# Altium PCB Ant_Robot.PcbDoc
Units mil, origin at the board's own origin, x right, y up, seen from the top; angles counter-clockwise.
Board outline 2790.03 x 1590.03 mil, 2 copper layers (Top Layer, Bottom Layer); 43 components, 38 nets, 224 pads, 25 vias.
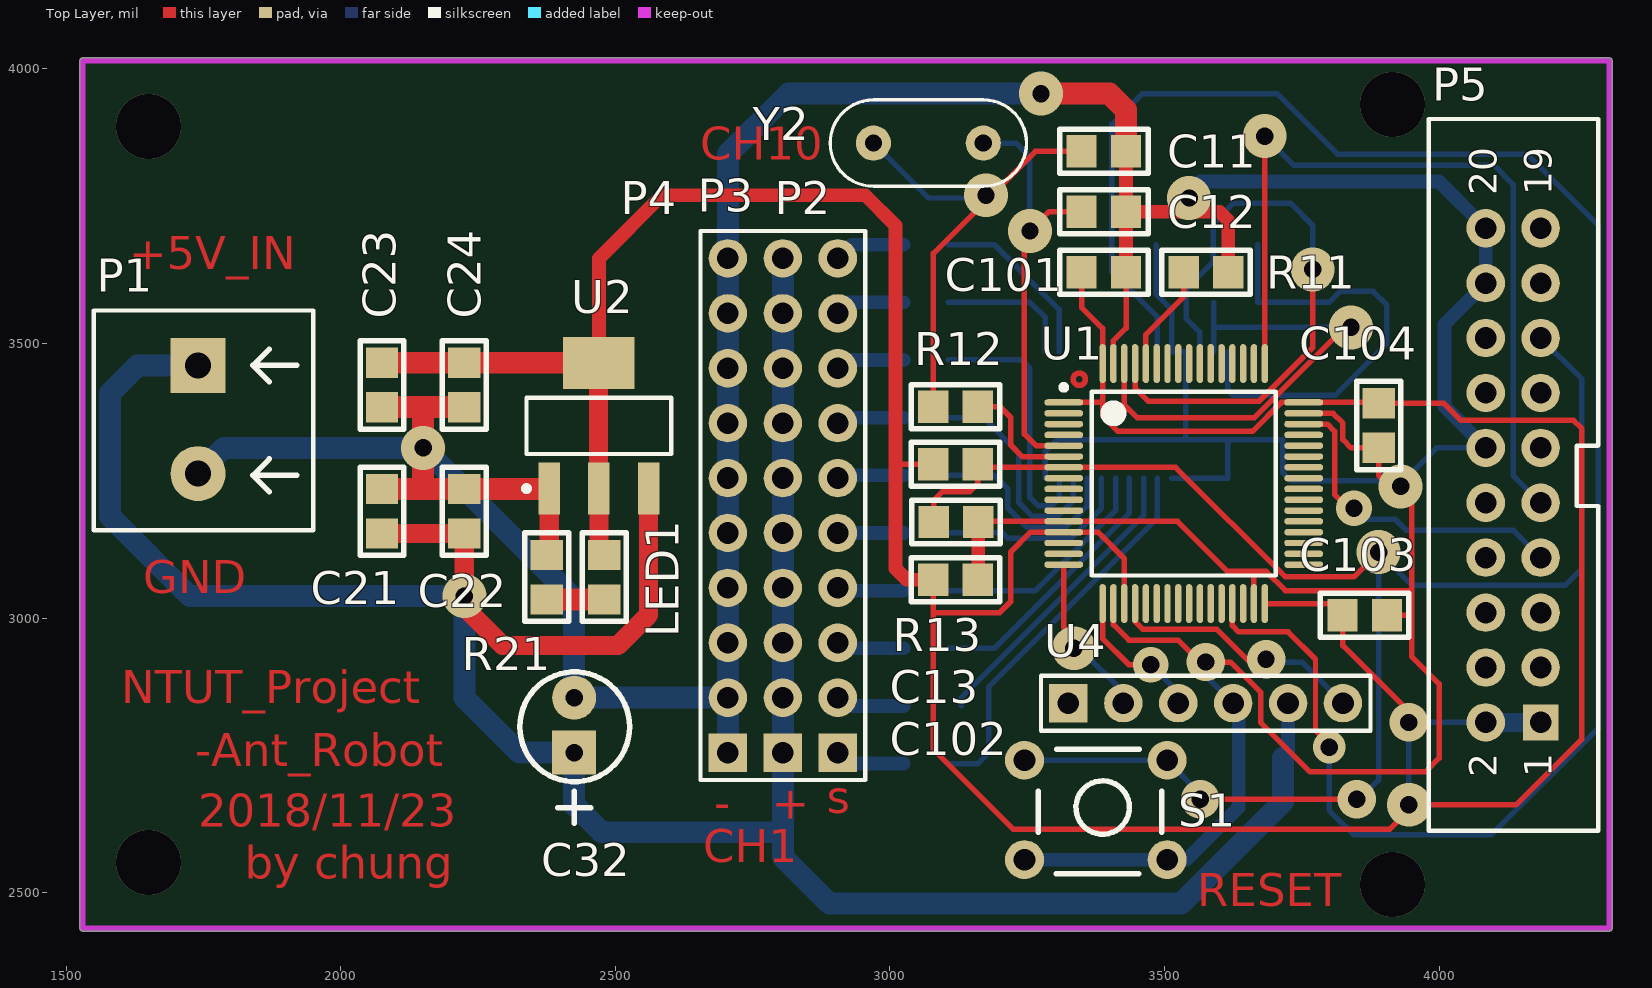
[diagram p0: Top Layer view]
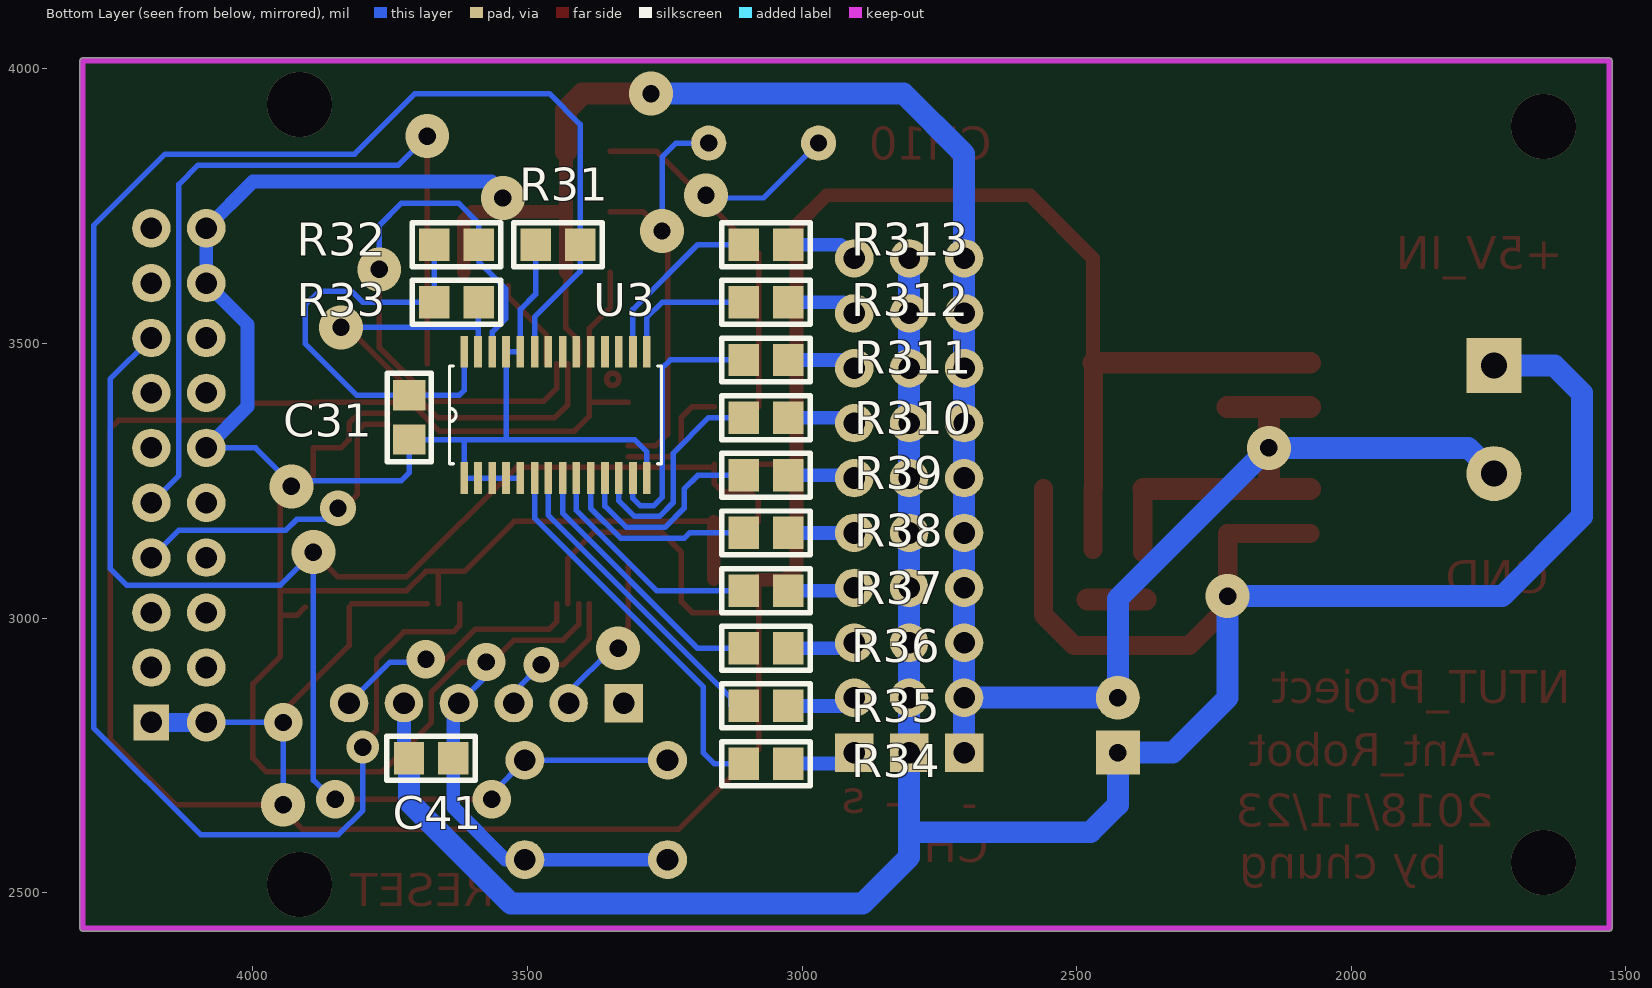
[diagram p1: Bottom Layer view, seen from below]

## Layer stack, top to bottom
Top Solder: solder mask 0.4, Solder Resist, Dk 3.5
Top Layer: signal copper 1.4
Dielectric 1: dielectric 12.6, FR-4, Dk 4.8
Bottom Layer: signal copper 1.4
Bottom Solder: solder mask 0.4, Solder Resist, Dk 3.5

## Board outline
1530,2429.99 cw(c1530,2435) 1524.98,2435 1524.98,4015 cw(c1530,4015) 1530,4020.01 4310,4020.01 cw(c4310,4015) 4315.02,4015 4315.02,2435 cw(c4310,2435) 4310,2429.99

## Design rules (kind name [scope] priority, off if disabled: settings)
Clearance [All] p1: gap=5 ignorepadtopadclearanceinfootprint=FALSE except(0: Arc-Hole Track-Hole SMDPad-Hole THPad-Hole Via-Hole Fill-Hole Poly-Hole Region-Hole Text-Hole)
ComponentClearance ComponentClearance_PWM_PORT [InComponentClass('PWM_PORT')] p1: gap=0 collisioncheckmode=3 verticalgap=0 showdistances=FALSE
ComponentClearance [All] p2: gap=5 collisioncheckmode=3 verticalgap=10 showdistances=FALSE
PolygonConnect [All] p1: connectstyle=Relief reliefconductorwidth=10 reliefentries=4 polygonreliefangle="90 Angle" airgapwidth=10
RoutingVias [All] p1: holewidth=31.5 width=70 viastyle="Through Hole" minholewidth=27.56 minwidth=50 maxholewidth=118.11 maxwidth=118.11
SilkToSilkClearance [All] p1: silktosilkclearance=5
SilkToSolderMaskClearance [IsPad] p1: minsilkscreentomaskgap=5 clearancetoexposedcopper=TRUE
SolderMaskExpansion [All] p1: expansion=4 istentingtop=FALSE
Width [All] p1: maxlimit=40 minlimit=10 preferedwidth=20
27 further rules are at their usual default settings.

## Classes and differential pairs
component class PWM_PORT: P2 P3 P4

## Components (designator, comment, footprint, x,y, rotation, side; value= is the part's Value field where it differs from the comment)
C11 "20pF" "SMD 0805" 3430,3850 r180 top
C12 "20pF" "SMD 0805" 3430,3740 r180 top
C13 "0.1uF" "SMD 0805" 3080,3175 r0 top
C21 "10uF" "SMD 0805" 2075,3235 r270 top
C22 "0.1uF" "SMD 0805" 2225,3235 r270 top
C23 "0.1uF" "SMD 0805" 2075,3465 r270 top
C24 "10uF" "SMD 0805" 2225,3465 r270 top
C31 "0.1uF" "SMD 0805" 3715,3325 r90 bottom
C32 "100uF" C2 2425,2855 r270 top
C41 "0.1uF" "SMD 0805" 3635,2745 r0 bottom
C101 "0.1uF" "SMD 0805" 3430,3630 r180 top
C102 "0.1uF" "SMD 0805" 3160,3070 r180 top
C103 "0.1uF" "SMD 0805" 3905,3005 r180 top
C104 "0.1uF" "SMD 0805" 3890,3310 r90 top
LED1 "LED" "SMD 0805" 2480,3115 r270 top
P1 "power" "HDR1X2 - 5mm" 1740,3460 r270 top
P2 "PWM" HDR1X10 2905,2755 r90 top
P3 "VCC" HDR1X10 2805,2755 r90 top
P4 "GND" HDR1X10 2705,2755 r90 top
P5 "JTAG_Connector" JTAG_PIN_20 4185,2810 r90 top
R11 "R1" "SMD 0805" 3535,3630 r0 top
R12 "R1" "SMD 0805" 3160,3385 r180 top
R13 "R1" "SMD 0805" 3160,3280 r180 top
R21 "R1" "SMD 0805" 2375,3115 r270 top
R31 "R1" "SMD 0805" 3485,3680 r180 bottom
R32 "R1" "SMD 0805" 3670,3680 r180 bottom
R33 "R1" "SMD 0805" 3670,3575 r180 bottom
R34 "R1" "SMD 0805" 3025,2735 r0 bottom
R35 "R1" "SMD 0805" 3025,2840 r0 bottom
R36 "R1" "SMD 0805" 3025,2945 r0 bottom
R37 "R1" "SMD 0805" 3025,3050 r0 bottom
R38 "R1" "SMD 0805" 3025,3155 r0 bottom
R39 "R1" "SMD 0805" 3025,3260 r0 bottom
R310 "R1" "SMD 0805" 3025,3365 r0 bottom
R311 "R1" "SMD 0805" 3025,3470 r0 bottom
R312 "R1" "SMD 0805" 3025,3575 r0 bottom
R313 "R1" "SMD 0805" 3025,3680 r0 bottom
S1 "SW" SW 3245,2560 r0 top
U1 "STM32L052R8" LQFP64_N 3535,3245 r0 top
U2 "AM1117" SOT-223 2470,3350 r90 top
U3 "PCA9685PW" TSSOP28 3615,3255 r180 bottom
U4 "HC_05" HDR1X6 3325,2845 r0 top
Y2 "8MHz" XTAL4-8 3070,3865 r180 top

## Footprints (in the part's own frame and the unit in brackets; to place one, negate y for a bottom-side part, rotate by r counter-clockwise, add the part's x,y. Pads: shape width x height; smd on the part's side, far side on the other; paste and mask are expansions set on the pad)
C2 [mil]
  rect 80x80 hole 31.5: 1(100,0)
  round 80 hole 31.5: 2(0,0)
  silkscreen extent -47,-99 229,101
"HDR1X2 - 5mm" [mm] "Connector; Header; 2 Position"
  rect 2.54x2.54 hole 1.2: 1(0,0)
  round 2.54 hole 1.2: 2(5,0)
  silkscreen extent -2.54,-4.83 7.62,5.33
HDR1X6 [mil] "Connector; Header; 6 Position"
  rect 70x70 hole 39.37: 1(0,0)
  round 70 hole 39.37: 2(100,0) 3(200,0) 4(300,0) 5(400,0) 6(500,0)
  silkscreen extent -50,-50 550,50
HDR1X10 [mil] "Connector; Header; 10 Position"
  rect 70x70 hole 39.37: 1(0,0)
  round 70 hole 39.37: 2(100,0) 3(200,0) 4(300,0) 5(400,0) 6(500,0) 7(600,0) 8(700,0) 9(800,0) 10(900,0)
  silkscreen extent -50,-50 950,50
JTAG_PIN_20 [mil] "Connector; Header; 10x2 Position"
  rect 65x65 hole 39.37: 1(0,0)
  round 70 hole 39.37: 2(0,100) 3(100,0) 4(100,100) 5(200,0) 6(200,100) 7(300,0) 8(300,100) 9(400,0) 10(400,100) 11(500,0) 12(500,100) 13(600,0) 14(600,100) 15(700,0) 16(700,100) 17(800,0) 18(800,100) 19(900,0) 20(900,100)
  silkscreen extent -197,-105 1099,204
LQFP64_N [mm] "Thin QFP, 64-Leads, Body 10x10mm, Pitch 0.5mm, IPC Medium Density"
  oval 1.8x0.3 smd: 1(-5.55,3.75) 2(-5.55,3.25) 3(-5.55,2.75) 4(-5.55,2.25) 5(-5.55,1.75) 6(-5.55,1.25) 7(-5.55,0.75) 8(-5.55,0.25) 9(-5.55,-0.25) 10(-5.55,-0.75) 11(-5.55,-1.25) 12(-5.55,-1.75) 13(-5.55,-2.25) 14(-5.55,-2.75) 15(-5.55,-3.25) 16(-5.55,-3.75) 33(5.55,-3.75) 34(5.55,-3.25) 35(5.55,-2.75) 36(5.55,-2.25) 37(5.55,-1.75) 38(5.55,-1.25) 39(5.55,-0.75) 40(5.55,-0.25) 41(5.55,0.25) 42(5.55,0.75) 43(5.55,1.25) 44(5.55,1.75) 45(5.55,2.25) 46(5.55,2.75) 47(5.55,3.25) 48(5.55,3.75)
  oval 0.3x1.8 smd: 17(-3.75,-5.55) 18(-3.25,-5.55) 19(-2.75,-5.55) 20(-2.25,-5.55) 21(-1.75,-5.55) 22(-1.25,-5.55) 23(-0.75,-5.55) 24(-0.25,-5.55) 25(0.25,-5.55) 26(0.75,-5.55) 27(1.25,-5.55) 28(1.75,-5.55) 29(2.25,-5.55) 30(2.75,-5.55) 31(3.25,-5.55) 32(3.75,-5.55) 49(3.75,5.55) 50(3.25,5.55) 51(2.75,5.55) 52(2.25,5.55) 53(1.75,5.55) 54(1.25,5.55) 55(0.75,5.55) 56(0.25,5.55) 57(-0.25,5.55) 58(-0.75,5.55) 59(-1.25,5.55) 60(-1.75,5.55) 61(-2.25,5.55) 62(-2.75,5.55) 63(-3.25,5.55) 64(-3.75,5.55)
  silkscreen extent -5.67,-4.25 4.25,4.57, body extent -5,-5 5,5, height 1.6
"SMD 0805" [mm]
  rect 1.4x1.5 smd: 1(0,0) 2(2.057,0)
  silkscreen extent -1.02,-1.02 3.07,1.02
SOT-223 [mm] "SOT223, 4-Leads, Body 6.7x7.3mm (max), Pitch 2.30mm, IPC Medium Density"
  rect 2.4x1 smd: 1(-2.9,2.3) 2(-2.9,0) 3(-2.9,-2.3)
  rect 2.4x3.3 smd: 2(2.9,0)
  silkscreen extent -3.02,-3.35 1.3,3.47, body extent -1.86,-3.35 1.86,3.35, height 1.8
SW [mm]
  round 1.8 hole 1: 1(0,4.6) 1(6.6,4.6) 2(0,0) 2(6.6,0)
  silkscreen extent 0.64,-0.66 6.35,5.11
TSSOP28 [mil]
  rect 14x58 smd: 1(0,0) 2(25,0) 3(51,0) 4(76,0) 5(102,0) 6(128,0) 7(153,0) 8(179,0) 9(204,0) 10(230,0) 11(256,0) 12(281,0) 13(307,0) 14(332,0) 15(332,230) 16(307,230) 17(281,230) 18(256,230) 19(230,230) 20(204,230) 21(179,230) 22(153,230) 23(128,230) 24(102,230) 25(76,230) 26(51,230) 27(25,230) 28(0,230)
  silkscreen extent -27,26 359,204
XTAL4-8 [mil]
  round 64 hole 31.5: 1(-100,0) 2(100,0)
  silkscreen extent -179,-79 179,79, body extent -178,-80 192,79, height 157

## Part data
C11 C12 C13 C21 C22 C23 C24 C31 C41 C101 C102 C103 C104: library part "C1 陶瓷"
C32: library part "C2 電解"
P1: library part "Header 2", "Header, 2-Pin"
P2 P3 P4: library part "Header 10", "Header, 10-Pin"
R11 R12 R13 R21 R31 R32 R33 R34 R35 R36 R37 R38 R39 R310 R311 R312 R313: "Resistor"
U3: "16Bits PWM Channel"
U4: library part "Header 6", "Header, 6-Pin"
Y2: library part XTAL, "Crystal Oscillator"

## Via types
v1: diameter 80, hole 31.5, Top Layer to Bottom Layer, 13 vias
v2: diameter 70, hole 31.5, Top Layer to Bottom Layer, 5 vias
v3: diameter 118.11, hole 118.11, Top Layer to Bottom Layer, 4 vias
v4: diameter 65, hole 31.5, Top Layer to Bottom Layer, 2 vias
v5: diameter 60, hole 31.5, Top Layer to Bottom Layer, 1 vias

## Nets (pads, with @x,y where several pads share a name; then routed paths per layer and width w, separated by ;. In a path a pad name is that pad's centre, name@x,y a point inside that pad or via, vN(x,y) a via of type N, cw(c..) or ccw(c..) an arc to the next point about the centre after c; other vN are vias at no path point)
3V3: C23.1 C24.1 C101.2 C102.2 C103.2 C104.2 LED1.1 P5.1 P5.2 R13.2 U1.1 U1.13 U1.19 U1.32 U1.48 U1.64 U2.2 | length 7112.7
  Top Layer w10: 3010,3280 R13.2 ; C102.2 3079,3010 ; U1.1 3387.36,3392.64 ; C101.2 3349,3566 3387.36,3527.64 U1.64 3387.36,3392.64 ; U1.19 3426.73,3108.27 3378.58,3156.42 U1.13 3256.42,3156.42 3220,3120 3220,3030 3200,3010 3079,3010 ; U1.32 C103.2@3820,3026.5 ; C103.2@3825,3020 3825,2950 v2@3955,2820 ; C104.2@3888.36,3392.64 U1.48 3712.64,3392.64 3660,3340 3415,3340 3387.36,3367.64 3387.36,3392.36 ; C104.2 4009,3391 4040,3360 4245,3360 4260,3345 4260,2780 4140,2660 v1(3945,2660) 3945,2650 3910,2615 3225,2615 3079,2761 3079,3010 ; 3387.36,3392.36 3387.36,3392.64 ; 3387.36,3392.36 3387.64,3392.64 3387.36,3392.64
  Top Layer w25: U2.2@2470,3464.17 2470,3655 2585,3770 2955,3770 3010,3715 3010,3280 3010,3090 3030,3070 C102.2
  Top Layer w35: U2.2@2469.17,3236.65 U2.2@2469.17,3465 ; LED1.1@2470,3125 U2.2@2470,3235.83
  Top Layer w40: C23.1 C24.1 U2.2@2469.17,3465
  Bottom Layer w10: v1(3945,2660) v2(3945,2810) P5.2
  Bottom Layer w35: P5.2 P5.1
+3V3: C31.2 R32.1 R33.1 U3.28 | length 831.3
  Bottom Layer w10: U3.28 3615,3415 3624,3406 C31.2 3811,3406 3905,3500 3905,3570 3880,3595 3820,3595 3800,3575 R33.1 R32.1
+5V: C21.2 C22.2 C32.1 C41.2 P1.1 P3.1 P3.2 P3.3 P3.4 P3.5 P3.6 P3.7 P3.8 P3.9 P3.10 U2.3 U4.5 | length 5238
  Top Layer w35: C21.2 C22.2 v1(2225,3040) 2225,3020 2295,2950 2505,2950 2560.55,3005.55 U2.3
  Bottom Layer w25: C41.2@3725,2754 U4.5 U4.5@3725,2865
  Bottom Layer w40: P1.1 1630,3460 1580,3410 1580,3185 1725,3040 v1(2225,3040) 2225,2855 2325,2755 C32.1 2425,2660 2475,2610 2805,2610 ; P3.10 P3.9 P3.8 P3.7 P3.6 P3.5 P3.4 P3.3 P3.2 P3.1 2805,2610 ; C41.2 3716,2666 3530,2480 2890,2480 2805,2565 2805,2610
CH1: R34.2 U3.6 | length 709.4
  Bottom Layer w10: R34.2 3160,2735 3180,2755 3180,2875 3487,3182 U3.6
CH2: R35.2 U3.7 | length 552.5
  Bottom Layer w10: R35.2@3130,2840 3130,2855 3462,3187 U3.7
CH3: R36.2 U3.8 | length 495.9
  Bottom Layer w10: R36.2 3190,2945 3436,3191 U3.8
CH4: R37.2 U3.9 | length 424.5
  Bottom Layer w10: R37.2 3265,3050 3411,3196 U3.9
CH5: R38.2 U3.10 | length 360.9
  Bottom Layer w10: R38.2 3205,3155 3215,3145 3330,3145 3385,3200 U3.10
CH6: R39.2 U3.11 | length 380
  Bottom Layer w10: R39.2 3190,3260 3215,3235 3215,3200 3250,3165 3320,3165 3359,3204 U3.11
CH7: R310.2 U3.12 | length 408.3
  Bottom Layer w10: R310.2 3170,3365 3235,3300 3235,3210 3260,3185 3305,3185 3334,3214 U3.12
CH8: R311.2 U3.13 | length 491.8
  Bottom Layer w10: R311.2 3240,3470 3255,3455 3255,3220 3270,3205 3295,3205 3308,3218 U3.13
CH9: R312.2 U3.15 | length 250.6
  Bottom Layer w10: R312.2 3255,3575 3283,3547 U3.15
CH10: R313.2 U3.16 | length 327.9
  Bottom Layer w10: R313.2 3190,3680 3308,3562 U3.16
EN: U1.20 U4.6 | length 475.1
  Top Layer w10: U1.20 3446.42,2993.58 3460,2980 3595,2980 3655,2920 v2@3685,2920
  Bottom Layer w10: v2(3685,2925) 3690,2920 3750,2920 U4.6
GND: C11.1 C12.1 C13.2 C21.1 C22.1 C23.2 C24.2 C31.1 C32.2 C41.1 C101.1 C102.1 C103.1 C104.1 P1.2 P4.1 P4.2 P4.3 P4.4 P4.5 P4.6 P4.7 P4.8 P4.9 P4.10 P5.12 P5.18 P5.20 R11.2 R21.1 R31.1 S1.2 U1.12 U1.18 U1.31 U1.47 U1.63 U2.1 U3.1 U3.2 U3.3 U3.4 U3.5 U3.14 U3.24 U3.25 U4.4 | length 10568.2
  Top Layer w10: C13.2@3162.1,3176.1 U1.12 3523.9,3176.1 3615,3085 3662.95,3085 ; U1.18 3407.05,2987.95 3435,2960 3525,2960 3565,2920 v2(3575,2920) 3620,2920 3675,2865 3675,2810 3765,2720 3975,2720 4000,2745 4000,2880 3950,2930 3950,3005 ; U1.63 3407.05,3505.16 3430,3528.11 C101.1 ; U1.31 3662.95,3085 ; U1.47 3807.05,3372.95 3825,3355 3825,3325 3840,3310 C104.1 3890,3260 3910,3240 v1(3930,3240) 3950,3220 3950,3005 ; C103.1@3905,3020 3920,3005 3950,3005 ; 3945,3050 3720,3050 3685,3085 3662.95,3085
  Top Layer w25: C102.1@3161,3071 C13.2 ; C101.1 C12.1 ; C11.1 C12.1 ; R11.2 3616,3724 3600,3740 C12.1
  Top Layer w35: R21.1@2379.45,3119.45 U2.1
  Top Layer w40: C21.1 C22.1 U2.1@2378.62,3235 ; C23.2 2150,3384 ; 2150,3240 v1(2150,3310) 2150,3384 ; C24.2 2150,3384 ; v1(3275,3955) 3400,3955 3430,3925 C11.1
  Bottom Layer w10: U3.14 3283,3303 3305,3325 3615,3325 ; R31.1 3485,3590 3513,3562 U3.24 U3.25 3539,3329 ; U3.5 U3.4 U3.3 U3.2 U3.1 3615,3325 ; v2(3575,2920) 3575,2895 U4.4 ; v1(3930,3240) v1@3925,3240 ; P5.12 3995,3310 v1@3925,3240 ; 3615,3325 C31.1 3715,3265 3730,3250 3915,3250 v1@3925,3240
  Bottom Layer w25: S1.2@3245,2560 3504.84,2560 3540,2560 3635,2655 C41.1 U4.4@3635,2845 ; v1(3545,3765) 3535,3765 3565,3795 4000,3795 P5.20 P5.18 4010,3535 4010,3385 P5.12
  Bottom Layer w40: P1.2 1786.85,3310 v1(2150,3310) 2425,3035 C32.2 P4.2 ; P4.1 P4.2 ; v1(3275,3955) 2815,3955 2705,3845 P4.10 P4.9 P4.8 P4.7 P4.6 P4.5 P4.4 P4.3 P4.2
NetC11_2: C11.2 R12.2 Y2.2 | length 884.5
  Top Layer w10: R12.2 3079,3664 3180,3765 3265,3850 C11.2
  Bottom Layer w10: Y2.2 3070,3765 3180,3765 v1(3175,3770)
NetC12_2: C12.2 U1.5 Y2.1 | length 793.2
  Top Layer w10: U1.5 3266.1,3313.9 3245,3335 3245,3695 v1(3255,3705) 3290,3740 C12.2
  Bottom Layer w10: Y2.1 3230,3865 3255,3840 v1(3255,3705)
NetLED1_2: LED1.2 R21.2 | length 105
  Top Layer w40: R21.2 LED1.2
NetP2_1: P2.1 R34.1 | length 100
  Bottom Layer w25: P2.1@2925,2735 R34.1
NetP2_2: P2.2 R35.1 | length 105
  Bottom Layer w25: P2.2@2920,2840 R35.1
NetP2_3: P2.3 R36.1 | length 110
  Bottom Layer w25: P2.3@2915,2945 R36.1
NetP2_4: P2.4 R37.1 | length 115
  Bottom Layer w25: P2.4@2910,3050 R37.1
NetP2_5: P2.5 R38.1 | length 120
  Bottom Layer w25: P2.5 R38.1
NetP2_6: P2.6 R39.1 | length 115
  Bottom Layer w25: P2.6@2910,3260 R39.1
NetP2_7: P2.7 R310.1 | length 110
  Bottom Layer w25: P2.7@2915,3365 R310.1
NetP2_8: P2.8 R311.1 | length 105
  Bottom Layer w25: P2.8@2920,3470 R311.1
NetP2_9: P2.9 R312.1 | length 100
  Bottom Layer w25: P2.9@2925,3575 R312.1
NetP2_10: P2.10 R313.1 | length 95
  Bottom Layer w25: 2930,3680 R313.1
NetR11_1: R11.1 U1.60 | length 170
  Top Layer w10: U1.60 3466.1,3516.1 3535,3585 R11.1@3535,3605
NetR12_1: R12.1 U1.6 | length 223.4
  Top Layer w10: R12.1 3200,3385 3220,3365 3220,3315 3240.79,3294.21 U1.6
NRST: C13.1 P5.15 R13.1 S1.1 U1.7 | length 2951
  Top Layer w10: C13.1 3080,3215 3095,3230 3145,3230 3160,3245 R13.1 ; R13.1@3165.47,3274.53 U1.7 3520.47,3274.53 3720,3075 3845,3075 v1(3890,3120) ; v2(3565,2670) v2(3850,2670)
  Bottom Layer w10: S1.1@3245,2741.1 3504.84,2741.1 v2@3565,2680.94 ; v2(3850,2670) 3855,2670 3890,2705 v1(3890,3120) 3950,3060 4230,3060 4260,3090 4260,3435 P5.15
O\E\: R31.2 U1.29 U3.23 | length 3493.7
  Top Layer w10: U1.29 3623.58,2986.42 3635,2975 3725,2975 3775,2925 3775,2795 3800,2770 3800,2760 v5(3800,2765)
  Bottom Layer w10: U3.23 3487,3548 3404,3631 R31.2 3404,3899 3460,3955 3705,3955 3815,3845 4160,3845 4290,3715 4290,2800 4095,2605 3845,2605 3800,2650 3800,2770 3800,2760 v5(3800,2765)
RX(Master): U1.17 U4.3 | length 241.9
  Top Layer w10: U1.17 3387.36,2962.64 3435,2915 v4(3475,2915)
  Bottom Layer w10: v4(3475,2915) U4.3@3525,2865
SCL: R32.2 U1.61 U3.26 | length 1117.9
  Top Layer w10: U1.61 3446.42,3418.58 3470,3395 3672.57,3395 3770,3492.43 v1(3770,3635)
  Bottom Layer w10: U3.26 3564,3521 3540,3545 3540,3600 3589,3649 R32.2 3589,3719 3625,3755 3730,3755 3770,3715 v1(3770,3635)
SDA: R33.2 U1.62 U3.27 | length 903.9
  Top Layer w10: U1.62 3426.73,3388.27 3450,3365 3663.79,3365 3828.86,3530.08 v1@3838.92,3530.08
  Bottom Layer w10: U3.27 3590,3529.5 ; R33.2@3590,3574 3590,3529.5 ; v1(3839.5,3529.5) 3590,3529.5
SWCLK: P5.9 U1.49 | length 1503.5
  Top Layer w10: U1.49 v1(3682.64,3877.64)
  Bottom Layer w10: v1(3682.64,3877.64) 3735.28,3825 4100,3825 4135,3790 4135,3260 P5.9
SWDIO: P5.7 U1.46 | length 616.7
  Top Layer w10: U1.46 3796.73,3353.27 3810,3340 3810,3225 v4@3840,3195
  Bottom Layer w10: v4@3825,3200 3845,3180 3920,3180 3940,3160 4135,3160 P5.7
  other v4: 3845,3200
TX(Master): U1.16 U4.2 | length 283.2
  Top Layer w10: U1.16 3316.5,2983.5 3335,2965 v1(3335,2945)
  Bottom Layer w10: v1(3335,2945) 3345,2945 U4.2@3425,2865
pads on no net: P5.3 P5.4 P5.5 P5.6 P5.8 P5.10 P5.11 P5.13 P5.14 P5.16 P5.17 P5.19 U1.2 U1.3 U1.4 U1.8 U1.9 U1.10 U1.11 U1.14 U1.15 U1.21 U1.22 U1.23 U1.24 U1.25 U1.26 U1.27 U1.28 U1.30 U1.33 U1.34 U1.35 U1.36 U1.37 U1.38 U1.39 U1.40 U1.41 U1.42 U1.43 U1.44 U1.45 U1.50 U1.51 U1.52 U1.53 U1.54 U1.55 U1.56 U1.57 U1.58 U1.59 U3.17 U3.18 U3.19 U3.20 U3.21 U3.22 U4.1
copper on no net: | length 68
  Top Layer w10: 3351.2,3444.3 ccw(c3345,3435) 3352.91,3442.91
  other v3: 3915,2515 1650,2555 1650,3895 3915,3935

## Keep-outs
Keep-Out Layer:
  lines w10: 1530,2435 1530,4015 4310,4015 4310,2435 1530,2435

## Other copper
Top Layer:
  text "CH10" at 2655,3835 h60
  text "+5V_IN" at 1615,3635 h60
  text "GND" at 1640,3045 h60
  text "NTUT_Project" at 1600,2845 h60
  text "-Ant_Robot" at 1735,2730 h60
  text "s" at 2885,2645 h60
  text "-" at 2680,2635 h60
  text "+" at 2785,2635 h60
  text "2018/11/23" at 1740,2620 h60
  text "CH1" at 2660,2555 h60
  text "by chung" at 1825,2525 h60
  text "RESET" at 3560,2475 h60

## Text inside footprints (layer, text, board x,y; h text height)
P5: Top Overlay "2" at 4105,2710 h50 r90; Top Overlay "1" at 4205,2710 h50 r90; Top Overlay "19" at 4205,3770 h50 r90; Top Overlay "20" at 4105,3770 h50 r90